# EAGLE board Prototype_n3 (EAGLE 9.7.0)
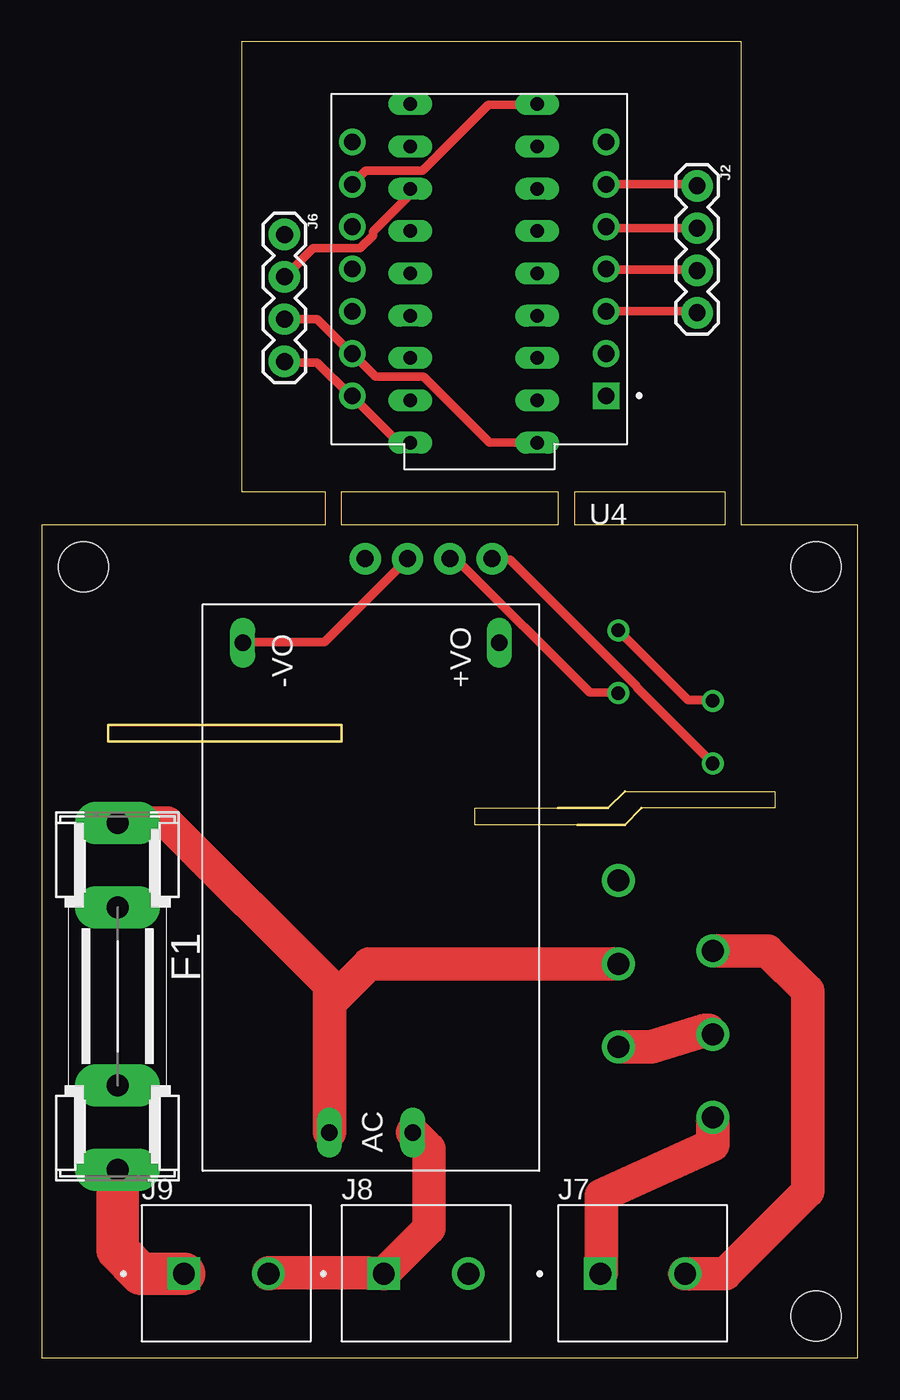
[diagram p0: board, top side]
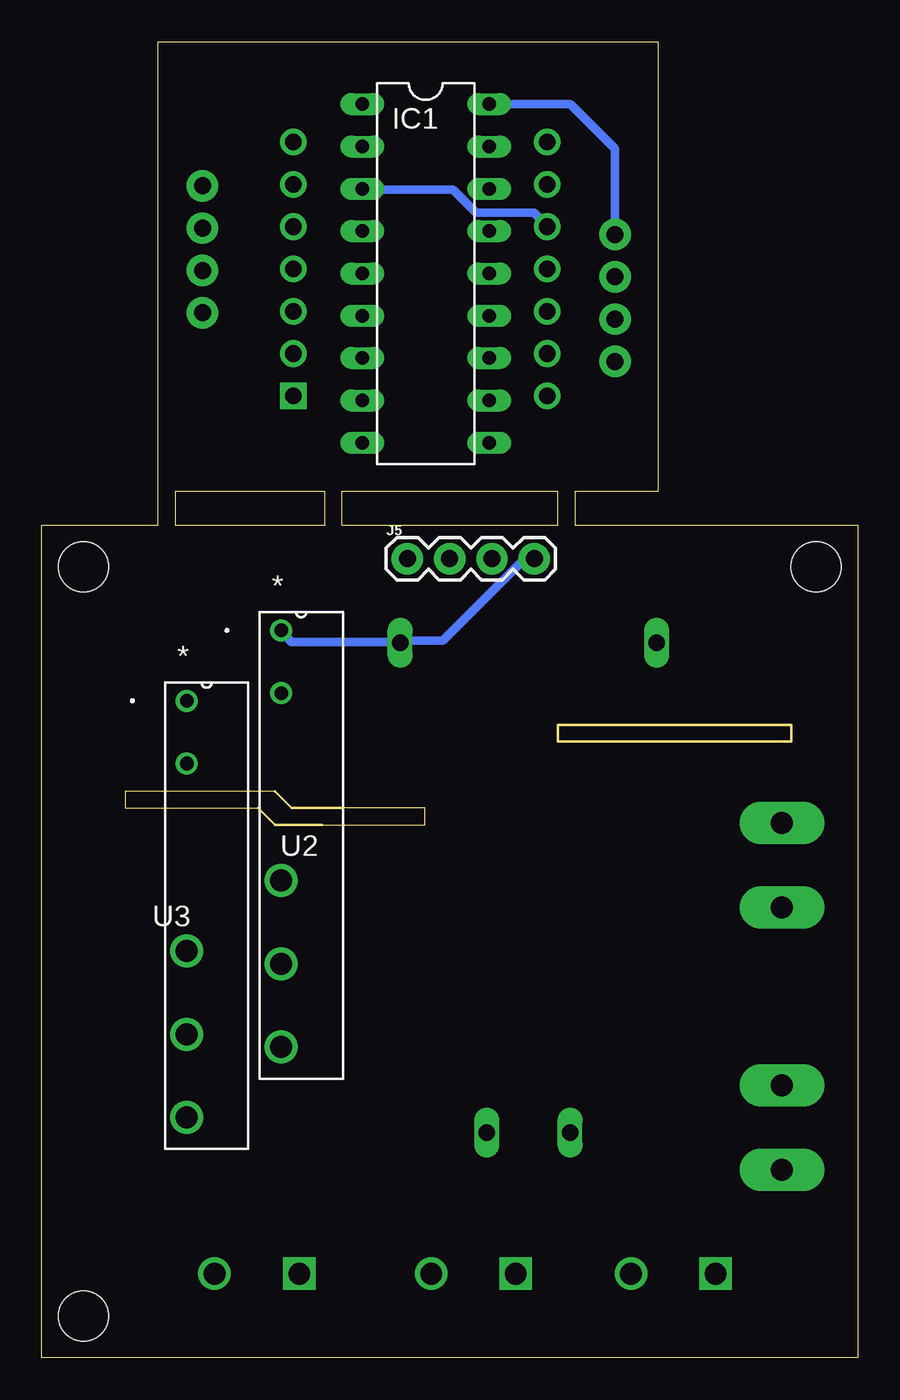
[diagram p1: board, bottom side, seen from below]

Size 49 x 79 mm. Coordinates in mm from the lower left corner, seen from the top.
Outline: 32,50 32,52 41,52 41,50 32,50
Outline: 18,50 18,52 31,52 31,50 18,50
Outline: 26,32 26,33 31,33 34,33 35,34 44,34 44,33 36,33 35,32 32.16,32 26,32
Outline: 0,50 0,0 49,0 49,50 42,50 42,79 12,79 12,52 17,52 17,50 0,50
Outline: 4,37 18,37 18,38 4,38 4,37
Copper layers (1*16): Top 0.035mm / dielectric 1.5mm / Bottom 0.035mm
Design rules "Fusion Electronics Design Rules": minimum track width 6mil, minimum drill 0.35mm, track to track 6mil, track to pad 6mil, pad to pad 6mil, via to via 6mil, smd to smd 6mil, copper to edge 40mil, drill to drill 6mil, minimum pad ring 10mil, minimum via ring 8mil, stop-mask expansion 4mil, vias tented up to drill 9999mil, thermal gap 10mil
Net classes: 1 230v: width 2 mm; 2 5v: width 0.5 mm
Holes 3 mm at 2.52,47.48 46.48,2.52 46.48,47.48

## Footprints (pad centres in the part's own frame; a part is rotated, then mirrored left to right if it is on the bottom)
SHK20L = drill 1.321 pad 2.54 long: 1A -10.414,0; 1B -5.334,0; 2A 10.414,0; 2B 5.334,0
DIL18 = drill 0.813 long: 1 -10.16,-3.81; 2 -7.62,-3.81; 3 -5.08,-3.81; 4 -2.54,-3.81; 5 0,-3.81; 6 2.54,-3.81; 7 5.08,-3.81; 8 7.62,-3.81; 9 10.16,-3.81; 10 10.16,3.81; 11 7.62,3.81; 12 5.08,3.81; 13 2.54,3.81; 14 0,3.81; 15 -2.54,3.81; 16 -5.08,3.81; 17 -7.62,3.81; 18 -10.16,3.81
1X04 = drill 1.016 pad 1.88: 1 0,0; 2 2.54,0; 3 5.08,0; 4 7.62,0
PHOENIX_1729128 = drill 1.3 square: 1 2.54,4.05 | drill 1.3: 2 7.62,4.05
RELAY_34.51_FIN = drill 0.813 pad 1.321: 1 -1.194,12.903; 2 -1.194,9.144 | drill 1.321 pad 1.829: 3 -1.194,-2.104; 4 -1.194,-7.104; 5 -1.194,-12.104
MODULE_113991254 = drill 1 pad 1.6 square: 1 -7.62,7.62 | drill 1 pad 1.6: 2 -7.62,5.08; 3 -7.62,2.54; 4 -7.62,0; 5 -7.62,-2.54; 6 -7.62,-5.08; 7 -7.62,-7.62; 8 7.62,-7.62; 9 7.62,-5.08; 10 7.62,-2.54; 11 7.62,0; 12 7.62,2.54; 13 7.62,5.08; 14 7.62,7.62
HLK-PM01 = drill 1 long: P$1 -14.7,2.5; P$2 -14.7,-2.5; P$3 14.7,7.7; P$4 14.7,-7.7

## Placement (x,y rotation side)
F1  [SHK20L]  4.56,21.7 270 top
IC1  [DIL18]  25.94,65.09 270 bottom
J2  [1X04]  39.35,70.35 270 top
J5  [1X04]  27.04,47.97 0 bottom
J6  [1X04]  14.58,67.42 270 top
J7  1729128  [PHOENIX_1729128]  31,1 0 top
J8  1729128  [PHOENIX_1729128]  18,1 0 top
J9  1729128  [PHOENIX_1729128]  6,1 0 top
U2  34.51.7.005.0010RELAY_34.51_FIN  [RELAY_34.51_FIN]  33.42,30.76 0 bottom
U3  34.51.7.005.0010RELAY_34.51_FIN  [RELAY_34.51_FIN]  39.1,26.53 0 bottom
U4  113991254  [MODULE_113991254]  26.27,65.36 180 top
U$1  HLK-PM01  [HLK-PM01]  19.78,28.22 90 top

## Library data of the parts
F1 = fuse; OC_FARNELL: unknown; OC_NEWARK: unknown
IC1 = uln-udn
J2 J5 J6 = SparkFun-Connectors; PROD_ID: CONN-09696
J7-J9 = 1729128; AVAILABILITY: In Stock; CHECK_PRICES: https://www.snapeda.com/parts/1729128/Phoenix+Contact/view-part/?ref=eda; DESCRIPTION: PCB Terminal Screw 5.08mm 16AWG 400V 13.5A 2 Position COMBICON MKDSN Series | Phoenix Contact 1729128; MF: Phoenix Contact; MP: 1729128; PACKAGE: None; PRICE: None; SNAPEDA_LINK: https://www.snapeda.com/parts/1729128/Phoenix+Contact/view-part/?ref=snap
U2 U3 = 34.51.7.005.0010; AVAILABILITY: In Stock; CHECK_PRICES: https://www.snapeda.com/parts/345170050010/Finder/view-part/?ref=eda; DESCRIPTION: RELAY, SPDT, 250VAC, 6A; Contact Configuration:SPDT; Coil Voltage:5VDC; Contact Current:6A; Product Range:34 Series; Relay Mounting:Through Hole; Coil Type:DC Sensitive; Contact Voltage VAC:250VAC; Relay Terminals:Solder; Contact Voltage VDC:30V; Contact Material:Silver Tin; Coil Resistance:130ohm; SVHC:No SVHC (15-Jan-2019); Approval Bodies:CSA, GOST, UL, VDE; Coil Current:38.4mA; Coil Voltage VDC Nom:5V; Contact Current AC Max:6A; Contact Current Max:10A; Contact Current Rating:6A; Contact Voltage AC Max:400V; Contact Voltage AC Nom:250V; DC Coil Power:0.17W; External Depth:5mm; External Height:15mm; External Length / Height:15mm; External Width:28mm; No. of Mechanical Operations:10000000; Nom Operating Power:170mW; Operating Temperature Max:85°C; Operating Temperature Min:-40°C; Power Rating:1.5kVA; Relay Type:Power - General Purpose; Switching Voltage AC / DC Min:250VAC; MF: Finder; MP: 345170050010; PACKAGE: None; PRICE: None; SNAPEDA_LINK: https://www.snapeda.com/parts/345170050010/Finder/view-part/?ref=snap
U4 = esp32-C6; AVAILABILITY: In Stock; CHECK_PRICES: https://www.snapeda.com/parts/113991254/Seeed+Studio/view-part/?ref=eda; DESCRIPTION: ESP32-C6 ESP32-C 802.11 b/g/n/ax (WiFi/WLAN/Wi-Fi 6), 802.15.4 (Matter, Thread, Zigbee®), Bluetooth® 5.x (BLE) RF (Transceiver) 2.4GHz Evaluation Board; MF: Seeed Technology Co., Ltd; MP: 113991254; PACKAGE: None; PRICE: None; SNAPEDA_LINK: https://www.snapeda.com/parts/113991254/Seeed+Studio/view-part/?ref=snap
U$1 = 1484249208697-powermodules

## Nets
3V3: U4.12
N$1: F1.2A J9.1
N$2 [230v]: F1.1A U2.4 U$1.P$1
N$3 [230v]: J8.1 J9.2 U$1.P$2
N$4 [5v]: J5.3 U$1.P$3
N$5 [5v]: J5.4 U2.1 U3.1 U$1.P$4
N$6 [5v]: J5.2 U2.2
N$7 [5v]: IC1.1 U4.9
N$8 [230v]: U2.5 U3.4
N$9 [5v]: J5.1 U3.2
N$10 [230v]: J7.1 U3.5
N$11 [230v]: J7.2 U3.3
N$12: J2.4 U4.3
N$13 [5v]: IC1.3 U4.10
N$14 [5v]: J2.3 U4.4
N$15 [5v]: J2.2 U4.5
N$16 [5v]: J2.1 U4.6
N$18 [5v]: IC1.10 J6.4 U4.14
N$19 [5v]: IC1.18 J6.1
N$20 [5v]: IC1.16 J6.2
N$21 [5v]: IC1.9 J6.3 U4.13

## Tracks (layer width: path | path; a pad name or v marks a point on that pad's centre or on a via)
N$1
  Top 2.54: F1.2A 4.56,6.44 5.95,5.05 J9.1
N$2
  Top 2: F1.1A 7.54,32.11 17.28,22.38 U$1.P$1 17.28,21.28 19.65,23.65 U2.4
N$3
  Top 2: U$1.P$2 23.25,12.55 23.25,7.78 20.57,5.11 J8.1 19.58,5.11 13.64,5.11 J9.2
N$4
  Top 0.5: U$1.P$3 12.12,42.98 16.99,42.98 21.95,47.93 J5.3
N$5
  Top 0.5: U3.1 40.23,39.47 38.79,39.47 34.67,43.59 U2.1
  Bottom 0.5: U2.1 34.59,43.59 33.98,42.98 27.51,42.98 U$1.P$4 27.28,43.05 24.92,43.05 20.04,47.93 19.43,47.93 J5.4
N$6
  Top 0.5: U2.2 34.59,39.93 32.92,39.93 24.92,47.93 24.54,47.93 J5.2
N$7
  Top 0.5: IC1.1 29.72,75.21 26.82,75.21 22.86,71.25 19.43,71.25 18.67,70.48 U4.9
N$8
  Top 2: U3.4 40.05,19.67 39.83,19.67 36.61,18.65 U2.5
N$9
  Top 0.5: U3.2 40.23,35.74 35.74,40.23 35.74,40.31 28.12,47.93 27.05,47.93 J5.1
N$10
  Top 2: J7.1 33.6,5.11 33.6,9.76 40.29,12.78 U3.5
N$11
  Top 2: J7.2 41.03,5.05 45.98,10 45.98,22.02 43.57,24.43 U3.3
N$12
  Top 0.508: U4.3 39.26,62.82 J2.4
N$13
  Bottom 0.5: IC1.3 29.72,70.1 24.31,70.1 22.94,68.73 19.43,68.73 18.67,67.97 U4.10
N$14
  Top 0.5: 33.91,65.3 U4.4 33.95,65.3 39.32,65.3 J2.3
N$15
  Top 0.5: J2.2 33.98,67.81 U4.5
N$16
  Top 0.5: U4.6 39.26,70.44 J2.1
N$18
  Top 0.5: IC1.10 22.1,54.94 21.41,54.94 18.67,57.68 U4.14 18.44,57.84 16.54,59.74 14.63,59.74 J6.4
N$19
  Bottom 0.5: 14.63,67.44 J6.1 14.58,72.58 17.25,75.25 IC1.18
N$20
  Top 0.5: IC1.16 22.1,70.1 22.1,69.8 19.89,67.59 19.89,67.36 19.13,66.6 16.31,66.6 14.63,64.92 J6.2
N$21
  Top 0.5: IC1.9 29.72,54.94 26.9,54.94 22.94,58.9 20.04,58.9 18.67,60.27 U4.13 18.44,60.43 16.54,62.33 14.63,62.33 J6.3